# EAGLE board Sensor_Board_2.03_HX711_DS18b2 (EAGLE 9.6.2)

Size 40 x 70 mm. Coordinates in mm from the lower left corner, seen from the top.
Outline: 0,0 40,0 40,70 0,70 0,0
Copper layers (1*16): Top 0.035mm / dielectric 1.5mm / Bottom 0.035mm
Design rules "default *": minimum track width 6mil, minimum drill 0.35mm, track to track 6mil, track to pad 6mil, pad to pad 6mil, via to via 6mil, smd to smd 6mil, copper to edge 40mil, drill to drill 1mm, minimum pad ring 10mil, minimum via ring 8mil, stop-mask expansion 4mil, vias tented up to drill 0mil, thermal gap 10mil
Net classes: 0 Signal: width 0.152 mm, clearance 0.305 mm; 1 Supply3v3: width 0.203 mm, clearance 0.305 mm; 2 Supply5v: width 0.406 mm, clearance 0.305 mm

## Footprints (pad centres in the part's own frame; a part is rotated, then mirrored left to right if it is on the bottom)
C5B2.5 = drill 0.813 pad 1.6 octagon: 1 -2.54,0; 2 2.54,0
1X02 = drill 1.016 long: 1 -1.27,0; 2 1.27,0
4P-2.0 = drill 0.8 pad 1.27 square: 1 -3,0 | drill 0.8 pad 1.27: 2 -1,0; 3 1,0; 4 3,0
TO92- = drill 0.813 octagon: 1 -2.54,0; 2 0,0; 3 2.54,0
1X03 = drill 1.016 long: 1 -2.54,0; 2 0,0; 3 2.54,0
1X01 = drill 1.016 octagon: 1 0,0
1X04 = drill 1.016 long: 1 -3.81,0; 2 -1.27,0; 3 1.27,0; 4 3.81,0
1X06 = drill 1.016 long: 1 -6.35,0; 2 -3.81,0; 3 -1.27,0; 4 1.27,0; 5 3.81,0; 6 6.35,0
1X05 = drill 1.016 long: 1 -5.08,0; 2 -2.54,0; 3 0,0; 4 2.54,0; 5 5.08,0
0207/10 = drill 0.813 octagon: 1 -5.08,0; 2 5.08,0
3,0 = hole 3: 0,0
233-506 = drill 1.2 long: A1 -6.35,2.5; A2 -3.81,2.5; A3 -1.27,2.5; A4 1.27,2.5; A5 3.81,2.5; A6 6.35,2.5; B1 -6.35,-2.5; B2 -3.81,-2.5; B3 -1.27,-2.5; B4 1.27,-2.5; B5 3.81,-2.5; B6 6.35,-2.5
233-505 = drill 1.2 long: A1 -5.08,2.5; A2 -2.54,2.5; A3 0,2.5; A4 2.54,2.5; A5 5.08,2.5; B1 -5.08,-2.5; B2 -2.54,-2.5; B3 0,-2.5; B4 2.54,-2.5; B5 5.08,-2.5

## Placement (x,y rotation side)
C1  10µF  [C5B2.5]  2.54,10.16 270 top
C3  100nF  [C5B2.5]  25.4,26.67 0 top
C4  100nF  [C5B2.5]  23.5,55.88 270 top
C_ON/OFF  [1X02]  22.86,21.59 270 top
CHANNEL_B  [1X02]  15.49,40.64 180 top
DS1  [4P-2.0]  36.7,33.02 90 top
DS2  [4P-2.0]  36.7,45.72 90 top
DS3  [4P-2.0]  36.7,58.42 90 top
DS18B20  DS2405  [TO92-]  6.35,40.64 0 top
DS18B20-1  [1X03]  34.16,33.02 90 top
DS18B20-2  [1X03]  34.16,45.72 90 top
DS18B20-3  [1X03]  34.16,58.42 90 top
E+_HX711_V  [1X02]  26.8,46.61 0 top
E-_GND  [1X02]  26.8,50.29 0 top
GND  [1X01]  36.83,67.31 0 top
HX711_V  [1X02]  27.94,57.15 180 top
HX_IN_GREN  [1X04]  8.89,52.07 0 top
HX_IN_PURPLE  [1X04]  12.95,48.26 0 top
HX_LOADCELL_GREN  [1X06]  8.89,26.67 0 top
HX_LOADCELL_PURPLE  [1X05]  11.68,20.32 0 top
R1  100Ohm  [0207/10]  19.05,35.56 270 top
R2  100Ohm  [0207/10]  11.43,35.56 270 top
R3  100Ohm  [0207/10]  20.32,48.26 270 top
U$1  [3,0]  25.91,5 0 top
U$2  [3,0]  25.91,65 0 top
U$5  [3,0]  5,35 0 top
X1  [233-506]  12.7,62.23 0 top
X2  [233-505]  13.97,8.89 180 top
X3  [233-505]  31.75,16.51 270 top

## Library data of the parts
C1 C3 C4 = capacitor-wima
C_ON/OFF CHANNEL_B DS18B20-1-DS18B20-3 E+_HX711_V E-_GND GND HX711_V HX_IN_GREN HX_IN_PURPLE HX_LOADCELL_GREN HX_LOADCELL_PURPLE = pinhead
DS1-DS3 = Connector
DS18B20 = maxim; MF: DALLAS SEMICONDUCTOR; MPN: DS2405; OC_FARNELL: 1188025; OC_NEWARK: 06F4645
R1-R3 = rcl; SPICEPREFIX: R
U$1 U$2 U$5 = holes
X1 = con-wago; MF: Wago Corporation; MPN: 0233-0506; OC_FARNELL: 1777100; OC_NEWARK: 79K2052
X2 X3 = con-wago; MF: Wago Corporation; MPN: 0233-0505; OC_FARNELL: unknown; OC_NEWARK: 79K2051

## Nets
3V3 [Supply3v3]: C4.1 DS1.3 DS2.3 DS3.3 DS18B20-1.2 DS18B20-2.2 DS18B20-3.2 DS18B20.3 HX711_V.2 X1.B6
A+: HX_LOADCELL_GREN.4 HX_LOADCELL_PURPLE.4 X2.B2
A-: HX_LOADCELL_GREN.3 HX_LOADCELL_PURPLE.3 X2.B3
B+: C_ON/OFF.2 HX_LOADCELL_GREN.6 R1.2 X3.B2
B-: C3.2 HX_LOADCELL_GREN.5 R2.2 X3.B3
DS18B20_DATA_GPIO11_PIN23: DS1.1 DS2.1 DS3.1 DS18B20-1.1 DS18B20-2.1 DS18B20-3.1 DS18B20.2 X1.B5
E+ [Supply5v]: C1.1 E+_HX711_V.2 HX_LOADCELL_GREN.1 HX_LOADCELL_PURPLE.1 X2.B5 X3.B5
E-: C1.2 E-_GND.2 HX_LOADCELL_GREN.2 HX_LOADCELL_PURPLE.2 X2.B4 X3.B4
GND [Supply5v]: C4.2 DS1.4 DS2.4 DS3.4 DS18B20-1.3 DS18B20-2.3 DS18B20-3.3 DS18B20.1 E-_GND.1 GND.1 HX_IN_GREN.1 HX_IN_PURPLE.4 HX_LOADCELL_PURPLE.5 X1.B4 X2.B1 X3.B1
HX711-DT: HX_IN_GREN.2 HX_IN_PURPLE.2 X1.B2
HX711-SCK: HX_IN_GREN.3 HX_IN_PURPLE.3 X1.B3
HX711_V [Supply3v3]: HX711_V.1 HX_IN_GREN.4 HX_IN_PURPLE.1 R3.1 X1.B1
N$1: CHANNEL_B.1 R1.1
N$2: CHANNEL_B.2 R2.1
N$3: C3.1 C_ON/OFF.1
N$4: E+_HX711_V.1 R3.2

## Tracks (layer width: path | path; a pad name or v marks a point on that pad's centre or on a via)
3V3  (9 unrouted)
A+  (2 unrouted)
A-  (2 unrouted)
B+  (3 unrouted)
B-  (3 unrouted)
DS18B20_DATA_GPIO11_PIN23  (7 unrouted)
E+  (5 unrouted)
E-  (5 unrouted)
GND  (15 unrouted)
HX711-DT  (2 unrouted)
HX711-SCK  (2 unrouted)
HX711_V  (4 unrouted)
N$1  (1 unrouted)
N$2  (1 unrouted)
N$3  (1 unrouted)
N$4  (1 unrouted)

## Text on the board
Top: MD
tNames: 3V3 / / DT / / SCK / / GND / / DAT / / 3V3 | GND / / 3V3 / / / DAT | GND / / DT / / SCK / / 3V3 | 3V3 | GND | 3V3 / / DAT / / CLK / / GND | HoneyPi Sensor Board / www.honey-pi.de / Vers. 2.03 / 1x HX711 / 3x DS18B20 | GND / / 3V3 / / / DAT | GND / / 3V3 / / / DAT | GND / / B+ / / B- / / E- / / E+ | Channel A | Channel B | E+ / / E- / / A- / / A+ / / GND